# EAGLE board ElectricalLoads (EAGLE 9.5.1)
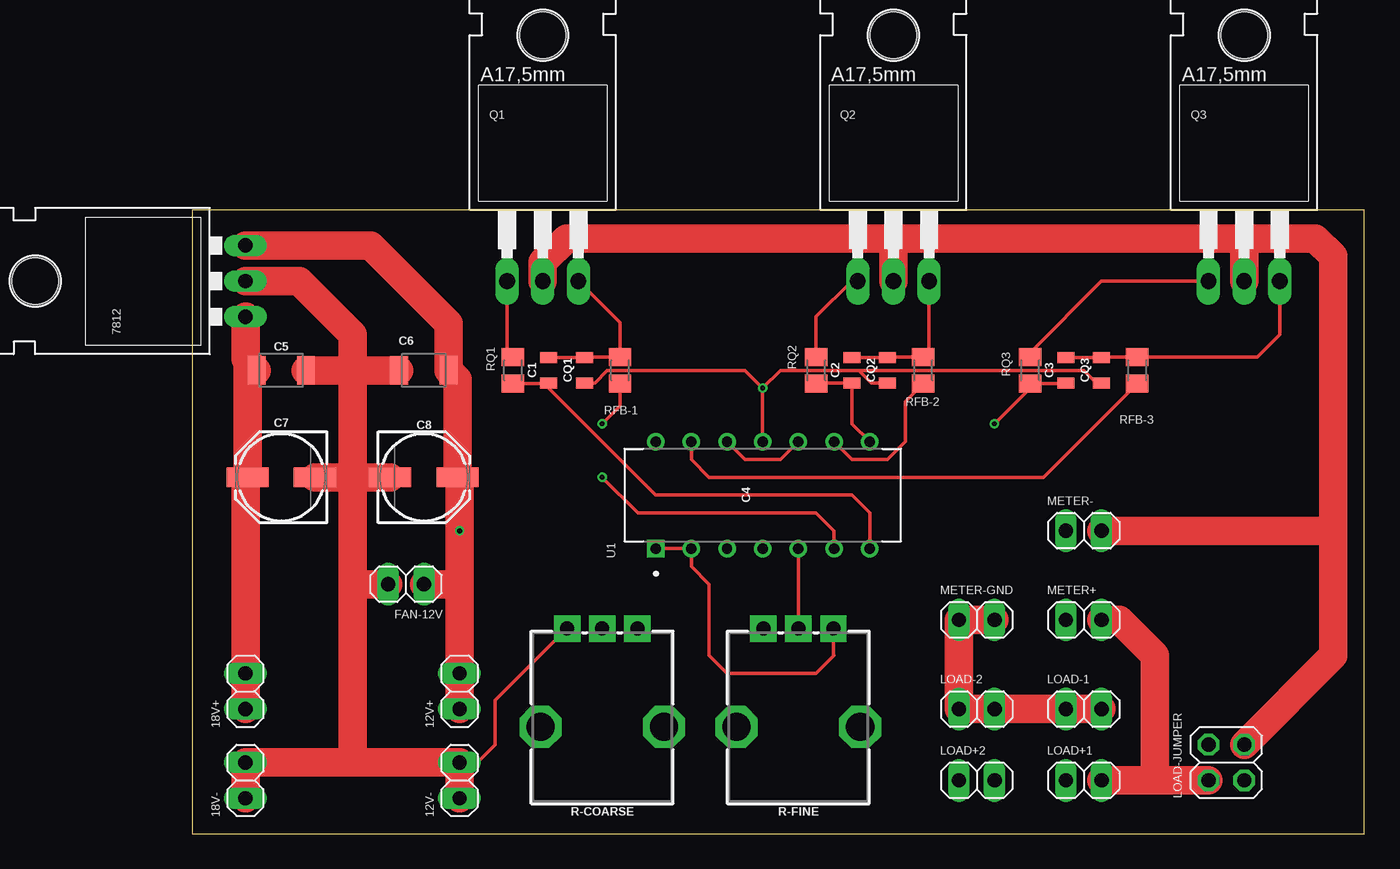
[diagram p0: board, top side]
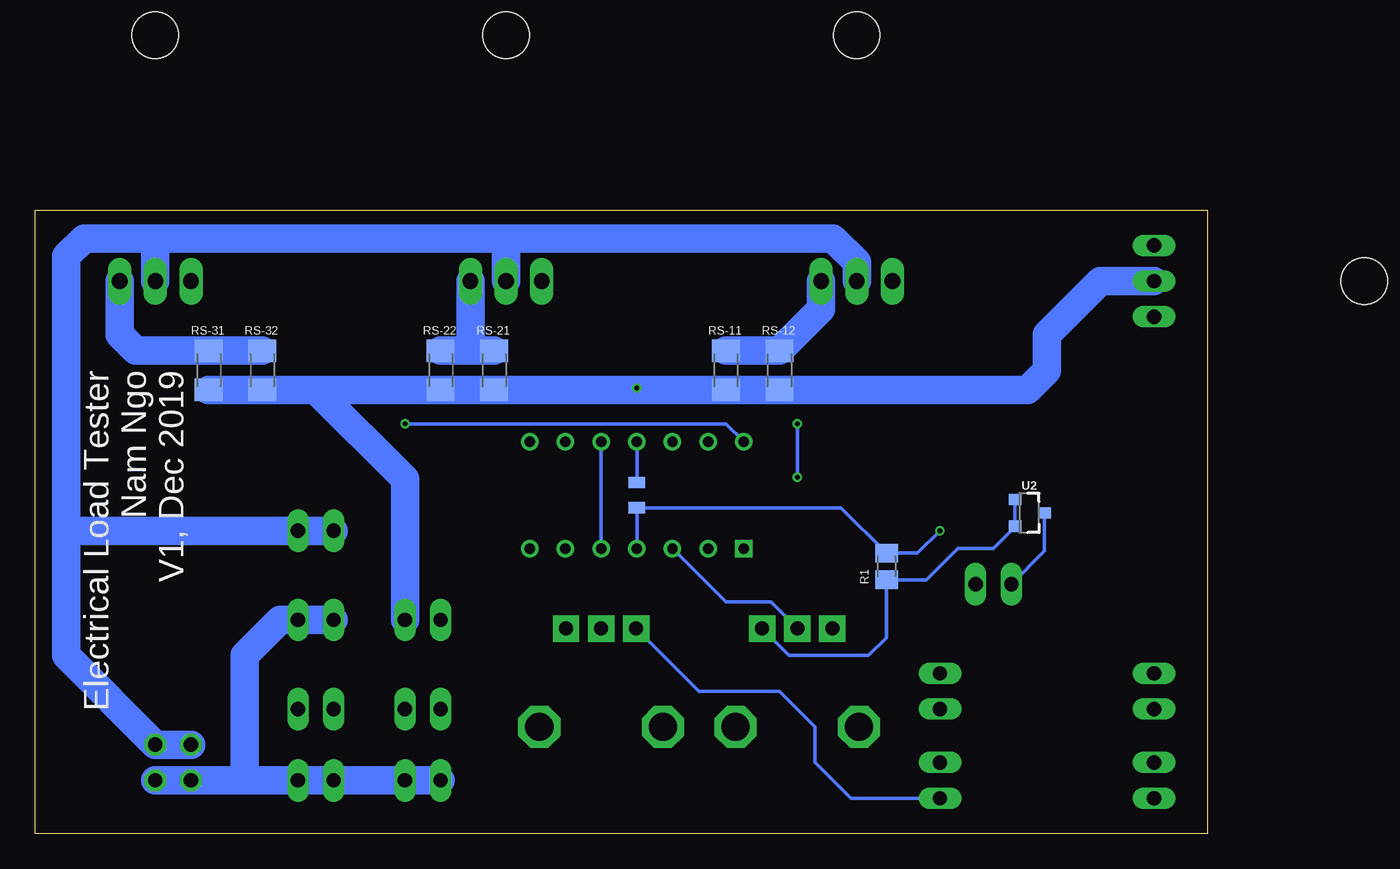
[diagram p1: board, bottom side, seen from below]

Size 83.49 x 44.44 mm. Coordinates in mm from the lower left corner, seen from the top.
Outline: 0,0 83.49,0 83.49,44.44 0,44.44 0,0
Copper layers (1*16): Top 0.035mm / dielectric 1.5mm / Bottom 0.035mm
Design rules "dirt_cheap_dirty_boards.v1.1": minimum track width 6mil, minimum drill 12mil, track to track 6mil, track to pad 6mil, pad to pad 6mil, via to via 6mil, smd to smd 0mil, copper to edge 10mil, drill to drill 10mil, minimum pad ring 10mil, minimum via ring 6mil, stop-mask expansion 2mil, vias tented up to drill 25mil, thermal gap 10mil

## Footprints (pad centres in the part's own frame; a part is rotated, then mirrored left to right if it is on the bottom)
1X02 = drill 1.016 long: 1 -1.27,0; 2 1.27,0
TO-220-ALT = drill 1.016 long: GND 0,-3.81; IN -2.54,-3.81; OUT 2.54,-3.81 | hole 3.302: 0,11.176
0805 = smd 0.8 x 1.2: 1 -0.9,0; 2 0.9,0
1210 = smd 1.27 x 2.06: 1 -1.755,0; 2 1.755,0
PANASONIC_D = smd 3 x 1.4: + 2.4,0; - -2.4,0
2X02 = drill 1.016 octagon: 1 -1.27,-1.27; 2 -1.27,1.27; 3 1.27,-1.27; 4 1.27,1.27
TO220BH = drill 1.118 long: D 0,-6.35; G -2.54,-6.35; S 2.54,-6.35 | hole 3.302: 0,11.176
M0805 = smd 1.3 x 1.6: 1 -0.95,0; 2 0.95,0
POT-PTH-ALPS = drill 1 pad 1.88 square: P$1 7,-2.5; P$2 7,0; P$3 7,2.5 | drill 2 octagon: P$4 0,-4.4; P$5 0,4.4
M1206 = smd 1.6 x 2: 1 -1.4,0; 2 1.4,0
DIP762W45P254L1969H508Q14 = drill 0.74 pad 1.14 square: 1 -3.81,7.62 | drill 0.74 pad 1.14: 2 -3.81,5.08; 3 -3.81,2.54; 4 -3.81,0; 5 -3.81,-2.54; 6 -3.81,-5.08; 7 -3.81,-7.62; 8 3.81,-7.62; 9 3.81,-5.08; 10 3.81,-2.54; 11 3.81,0; 12 3.81,2.54; 13 3.81,5.08; 14 3.81,7.62
SOT23-3 = smd 0.8 x 0.9: 1 -0.95,-1; 2 0.95,-1; 3 0,1.1

## Placement (x,y rotation side)
12V+  [1X02]  19.05,10.16 90 top
12V-  [1X02]  19.05,3.81 90 top
18V+  [1X02]  3.81,10.16 90 top
18V-  [1X02]  3.81,3.81 90 top
7812  [TO-220-ALT]  0,39.37 90 top
C1  1n  [0805]  25.4,33.02 90 top
C2  1n  [0805]  46.99,33.02 90 top
C3  1n  [0805]  62.23,33.02 90 top
C4  0.1  [0805]  40.64,24.13 270 bottom
C5  1uF  [1210]  6.35,33.02 0 top
C6  1uF  [1210]  16.51,33.02 180 top
C7  100uF  [PANASONIC_D]  6.35,25.4 180 top
C8  100uF  [PANASONIC_D]  16.51,25.4 0 top
CQ1  0.1  [0805]  27.94,33.02 90 top
CQ2  0.1  [0805]  49.53,33.02 90 top
CQ3  0.1  [0805]  64.77,33.02 90 top
FAN-12V  [1X02]  15.24,17.78 180 top
LOAD+1  [1X02]  63.5,3.81 0 top
LOAD+2  [1X02]  55.88,3.81 0 top
LOAD-1  [1X02]  63.5,8.89 0 top
LOAD-2  [1X02]  55.88,8.89 0 top
LOAD-JUMPER  [2X02]  73.66,5.08 90 top
METER+  [1X02]  63.5,15.24 0 top
METER-  [1X02]  63.5,21.59 0 top
METER-GND  [1X02]  55.88,15.24 0 top
Q1  IRLZ44Z  [TO220BH]  24.98,45.72 0 top
Q2  IRLZ44Z  [TO220BH]  49.95,45.72 0 top
Q3  IRLZ44Z  [TO220BH]  74.93,45.72 0 top
R1  1k  [M0805]  22.86,19.05 90 bottom
R-COARSE  10k  [POT-PTH-ALPS]  29.21,7.62 90 top
R-FINE  100k  [POT-PTH-ALPS]  43.18,7.62 90 top
RFB-1  1k  [M0805]  30.48,33.02 270 top
RFB-2  1k  [M0805]  52.07,33.02 270 top
RFB-3  1k  [M0805]  67.31,33.02 270 top
RQ1  1k  [M0805]  22.86,33.02 270 top
RQ2  1k  [M0805]  44.45,33.02 270 top
RQ3  1k  [M0805]  59.69,33.02 270 top
RS-11  .1  [M1206]  34.29,33.02 90 bottom
RS-12  .1  [M1206]  30.48,33.02 90 bottom
RS-21  .1  [M1206]  50.8,33.02 90 bottom
RS-22  .1  [M1206]  54.61,33.02 90 bottom
RS-31  .1  [M1206]  71.12,33.02 90 bottom
RS-32  .1  [M1206]  67.31,33.02 90 bottom
U1  LM324N  [DIP762W45P254L1969H508Q14]  40.64,24.13 90 top
U2  TL431SOT23  [SOT23-3]  12.7,22.86 270 bottom

## Library data of the parts
12V+ 12V- 18V+ 18V- FAN-12V LOAD+1 LOAD+2 LOAD-1 LOAD-2 LOAD-JUMPER METER+ METER- METER-GND = pinhead
7812 = SparkFun-IC-Power; PROD_ID: VREG-08450; SF_ID: COM-00107
C1-C4 CQ1-CQ3 = SparkFun-Capacitors
C5 C6 = SparkFun-Capacitors; PROD_ID: CAP-09824
C7 C8 = SparkFun-Capacitors; PROD_ID: CAP-12547
Q1-Q3 = transistor-power
R1 RFB-1-RFB-3 RQ1-RQ3 RS-11 RS-12 RS-21 RS-22 RS-31 RS-32 = rcl; SPICEPREFIX: R
R-COARSE R-FINE = SparkFun-Resistors; PROD_ID: RES-09177; SF_SKU: COM-09288
U1 = LM324N; AVAILABILITY: Unavailable; DESCRIPTION: OP Amp Quad GP ±15V/30V 14-Pin PDIP Tube; MF: Texas Instruments; MP: LM324N; PACKAGE: DIP-14 STMicroelectronics; PRICE: None
U2 = SparkFun-DiscreteSemi

## Nets
+7V: LOAD-JUMPER.3 LOAD-JUMPER.4 METER-.1 METER-.2 Q1.D Q2.D Q3.D
+12V: 12V+.1 12V+.2 7812.OUT C4.2 C6.1 C8.+ FAN-12V.1 R1.2 U1.4
GND: 12V-.1 12V-.2 18V-.1 18V-.2 7812.GND C4.1 C5.2 C6.2 C7.- C8.- CQ1.1 CQ2.1 CQ3.1 FAN-12V.2 LOAD-1.1 LOAD-1.2 LOAD-2.1 LOAD-2.2 METER-GND.1 METER-GND.2 R-COARSE.P$3 R-FINE.P$3 RS-11.1 RS-12.1 RS-21.1 RS-22.1 RS-31.1 RS-32.1 U1.11 U2.3
N$1: C1.2 CQ1.2 Q1.S RFB-1.1 RS-11.2 RS-12.2
N$2: Q1.G RQ1.1
N$4: C1.1 RQ1.2 U1.7
N$5: RFB-1.2 U1.6
N$6: C2.2 CQ2.2 Q2.S RFB-2.1 RS-21.2 RS-22.2
N$7: Q2.G RQ2.1
N$9: C2.1 RQ2.2 U1.8
N$10: RFB-2.2 U1.9
N$11: C3.2 CQ3.2 Q3.S RFB-3.1 RS-31.2 RS-32.2
N$12: Q3.G RQ3.1
N$13: R1.1 R-COARSE.P$1 U2.1 U2.2
N$14: C3.1 RQ3.2 U1.14
N$15: RFB-3.2 U1.13
N$16: R-COARSE.P$2 U1.3
N$17: R-FINE.P$2 U1.5 U1.10 U1.12
N$18: R-FINE.P$1 U1.1 U1.2
N$19: LOAD+1.1 LOAD+1.2 LOAD+2.1 LOAD+2.2 LOAD-JUMPER.1 LOAD-JUMPER.2 METER+.1 METER+.2
VCC/2: 18V+.1 18V+.2 7812.IN C5.1 C7.+

## Tracks (layer width: path | path; a pad name or v marks a point on that pad's centre or on a via)
+7V
  Top 2.032: 49.95,42.41 74.93,42.41 | Q2.D 49.95,42.41 | LOAD-JUMPER.3 81.28,12.7 81.28,21.59 | 81.28,21.59 81.28,41.14 80.01,42.41 74.93,42.41 | Q3.D | Q3.D 74.93,42.41 | METER-.2 81.28,21.59 | Q1.D 24.98,40.72 26.67,42.41 49.95,42.41
  Bottom 2.032: LOAD-JUMPER.4 LOAD-JUMPER.3 81.28,12.7 81.28,21.59 | 81.28,21.59 81.28,41.14 80.01,42.41 74.93,42.41 | 74.93,42.41 49.53,42.41 | 49.53,42.41 26.67,42.41 24.98,40.72 Q1.D | Q2.D 49.95,41.98 49.53,42.41 | Q3.D 74.93,42.41 | 74.93,42.41 | METER-.1 METER-.2 81.28,21.59
+12V  (via drill 0.35)
  Top 2.032: 12V+.1 12V+.2 19.05,17.78 | 19.05,17.78 v19.05,21.59 19.05,25.4 C8.+ 18.91,32.38 C6.1 18.27,36.34 12.7,41.91 7812.OUT | FAN-12V.1 19.05,17.78
  Bottom 0.254: v19.05,21.59 20.64,20 R1.2 26.09,23.23 C4.2 U1.4
GND  (via drill 0.35)
  Top 0.254: CQ2.1 48.39,32.12 47.51,33 | 47.51,33 41.89,33 v40.64,31.75 | v40.64,31.75 U1.11 | CQ1.1 28.69,32.12 29.56,33 39.39,33 v40.64,31.75 | CQ3.1 64.4,32.12 63.5,33.02 47.53,33.02 47.51,33 | 12V-.2 20.32,5.08 21.59,6.35 21.59,9.5 R-COARSE.P$3
  Top 2.032: 11.43,25.4 11.43,33.02 | 11.43,25.4 11.43,17.78 | 11.43,17.78 11.43,5.08 | 11.43,5.08 12V-.2 12V-.1 | 11.43,5.08 18V-.2 18V-.1 | C8.- 11.43,25.4 | 11.43,25.4 C7.- | C6.2 11.43,33.02 | 11.43,33.02 C5.2 | LOAD-1.2 LOAD-1.1 LOAD-2.2 LOAD-2.1 METER-GND.1 METER-GND.2 | FAN-12V.2 11.43,17.78 | 7812.GND 7.62,39.37 11.43,35.56 11.43,33.02
  Bottom 0.254: v40.64,31.75 40.64,31.62 | FAN-12V.2 11.6,20.15 U2.3 | C4.1 U1.11 | R-FINE.P$3 36.22,10.16 30.48,10.16 27.94,7.62 27.94,5.08 25.4,2.54 12V-.1
  Bottom 2.032: 63.5,31.62 RS-22.1 RS-21.1 40.64,31.62 RS-11.1 RS-12.1 12.83,31.62 11.43,33.02 11.43,35.56 7.62,39.37 7812.GND | 63.5,31.62 RS-32.1 RS-31.1 | METER-GND.2 57.15,25.27 63.5,31.62
N$1
  Top 0.254: C1.2 CQ1.2 27.99,33.97 RFB-1.1 30.48,36.41 Q1.S
  Bottom 2.032: RS-11.2 RS-12.2 27.52,37.38 Q1.S
N$2
  Top 0.254: RQ1.1 22.44,34.39 Q1.G
N$4
  Top 0.254: RQ1.2 25.35,32.07 | 25.35,32.07 C1.1 | U1.7 48.26,22.86 46.99,24.13 33.02,24.13 25.35,31.8 25.35,32.07
N$5  (via drill 0.35)
  Top 0.254: v29.21,29.21 30.48,30.48 RFB-1.2 | U1.6 45.72,21.59 44.45,22.86 31.75,22.86 v29.21,25.4
  Bottom 0.254: v29.21,25.4 v29.21,29.21
N$6
  Top 0.254: Q2.S 52.49,34.39 RFB-2.1 49.58,33.97 CQ2.2 C2.2
  Bottom 2.032: RS-21.2 52.07,34.42 | 52.07,34.42 RS-22.2 | Q2.S 52.49,34.84 52.07,34.42
N$7
  Top 0.254: Q2.G 46.99,39.37 44.45,36.83 RQ2.1
N$9
  Top 0.254: RQ2.2 44.5,32.12 C2.1 46.99,29.21 U1.8
N$10
  Top 0.254: U1.9 46.99,26.67 49.53,26.67 50.8,27.94 50.8,30.8 RFB-2.2
N$11
  Top 0.254: C3.2 CQ3.2 64.82,33.97 RFB-3.1 75.88,33.97 77.47,35.56 Q3.S
  Bottom 2.032: RS-32.2 RS-31.2 76.33,34.42 77.47,35.56 Q3.S | Q3.S
N$12
  Top 0.254: RQ3.1 59.69,34.29 64.77,39.37 Q3.G
N$13
  Bottom 0.254: R-COARSE.P$1 29.79,12.7 24.13,12.7 22.86,13.97 R1.1 20,18.1 17.78,20.32 15.24,20.32 13.7,21.86 U2.2 U2.1
N$14  (via drill 0.35)
  Top 0.254: C3.1 62.18,32.07 RQ3.2 59.69,31.75 v57.15,29.21
  Bottom 0.254: U1.14 34.29,29.21 v57.15,29.21
N$15
  Top 0.254: RFB-3.2 60.64,25.4 36.83,25.4 35.56,26.67 U1.13
N$16
  Bottom 0.254: R-COARSE.P$2 31.1,16.51 34.29,16.51 U1.3
N$17
  Top 0.254: R-FINE.P$2 U1.5 | U1.12 39.37,26.67 41.91,26.67 U1.10
  Bottom 0.254: U1.10 U1.5
N$18
  Top 0.254: U1.1 U1.2 35.56,19.05 36.83,17.78 36.83,12.7 38.1,11.43 44.45,11.43 45.72,12.7 45.68,12.74 R-FINE.P$1
N$19
  Top 2.032: LOAD+1.2 68.58,3.81 | 68.58,3.81 LOAD-JUMPER.2 | 68.58,3.81 68.58,12.7 66.04,15.24 METER+.2
  Bottom 2.032: LOAD+2.1 LOAD+2.2 LOAD+1.1 LOAD+1.2 68.58,3.81 | 68.58,3.81 LOAD-JUMPER.2 LOAD-JUMPER.1 | 68.58,3.81 68.58,12.7 66.04,15.24 METER+.2 METER+.1
VCC/2
  Top 2.032: 18V+.1 18V+.2 3.81,25.26 C7.+ 3.95,33.67 | 3.95,33.67 C5.1 | 7812.IN 3.81,33.81 3.95,33.67

## Text on the board
bPlace: Electrical Load Tester / Nam Ngo / V1, Dec 2019